# Altium PCB PCBDevkit.PcbDoc
Units mm, origin at the board's own origin, x right, y up, seen from the top; angles counter-clockwise.
Board outline 62.36 x 68.45 mm, 2 copper layers (Top Layer, Bottom Layer); 28 components, 24 nets, 139 pads, 7 vias.
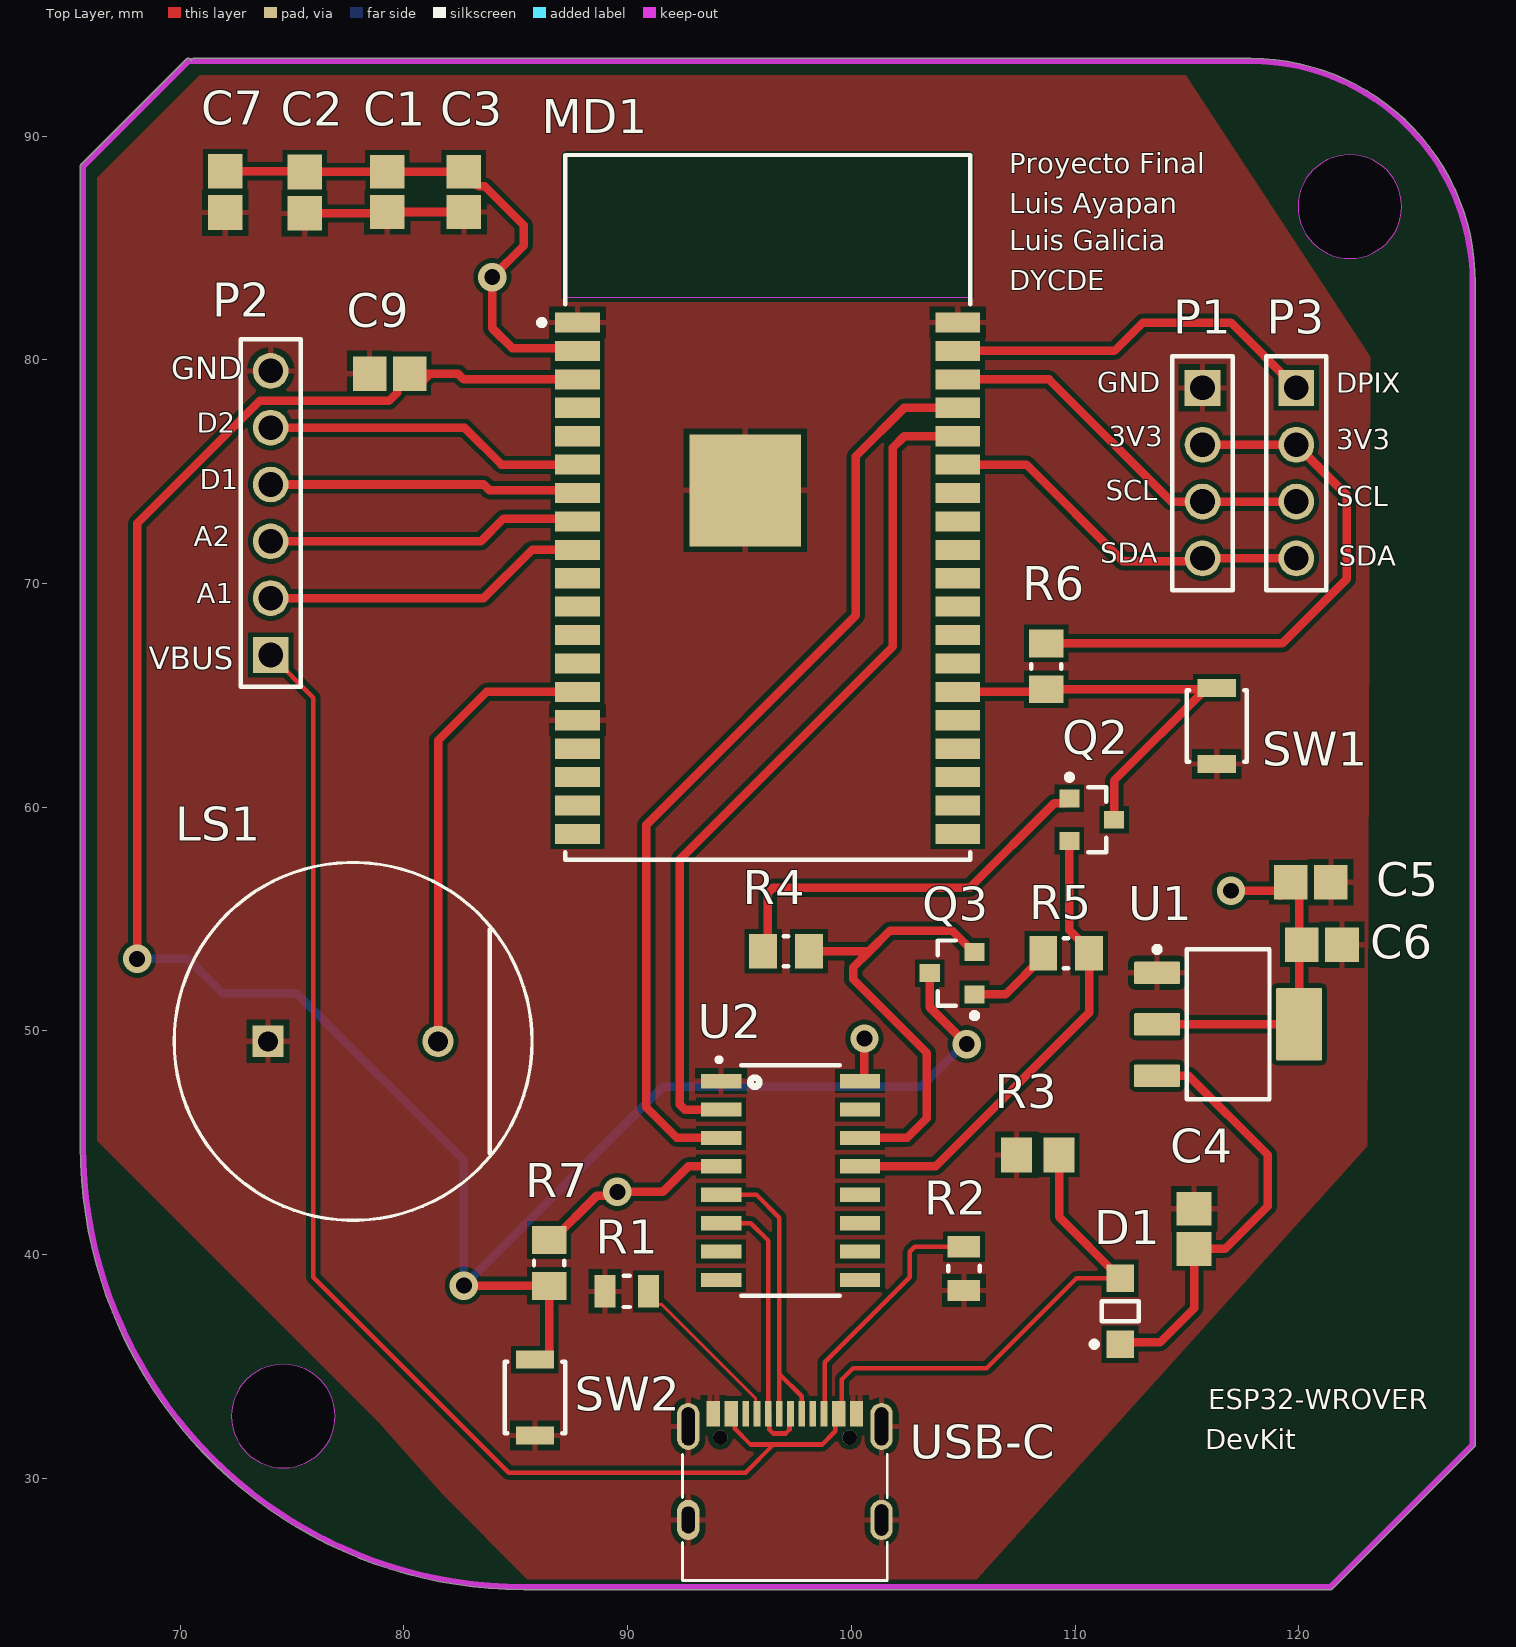
[diagram p0: Top Layer view]
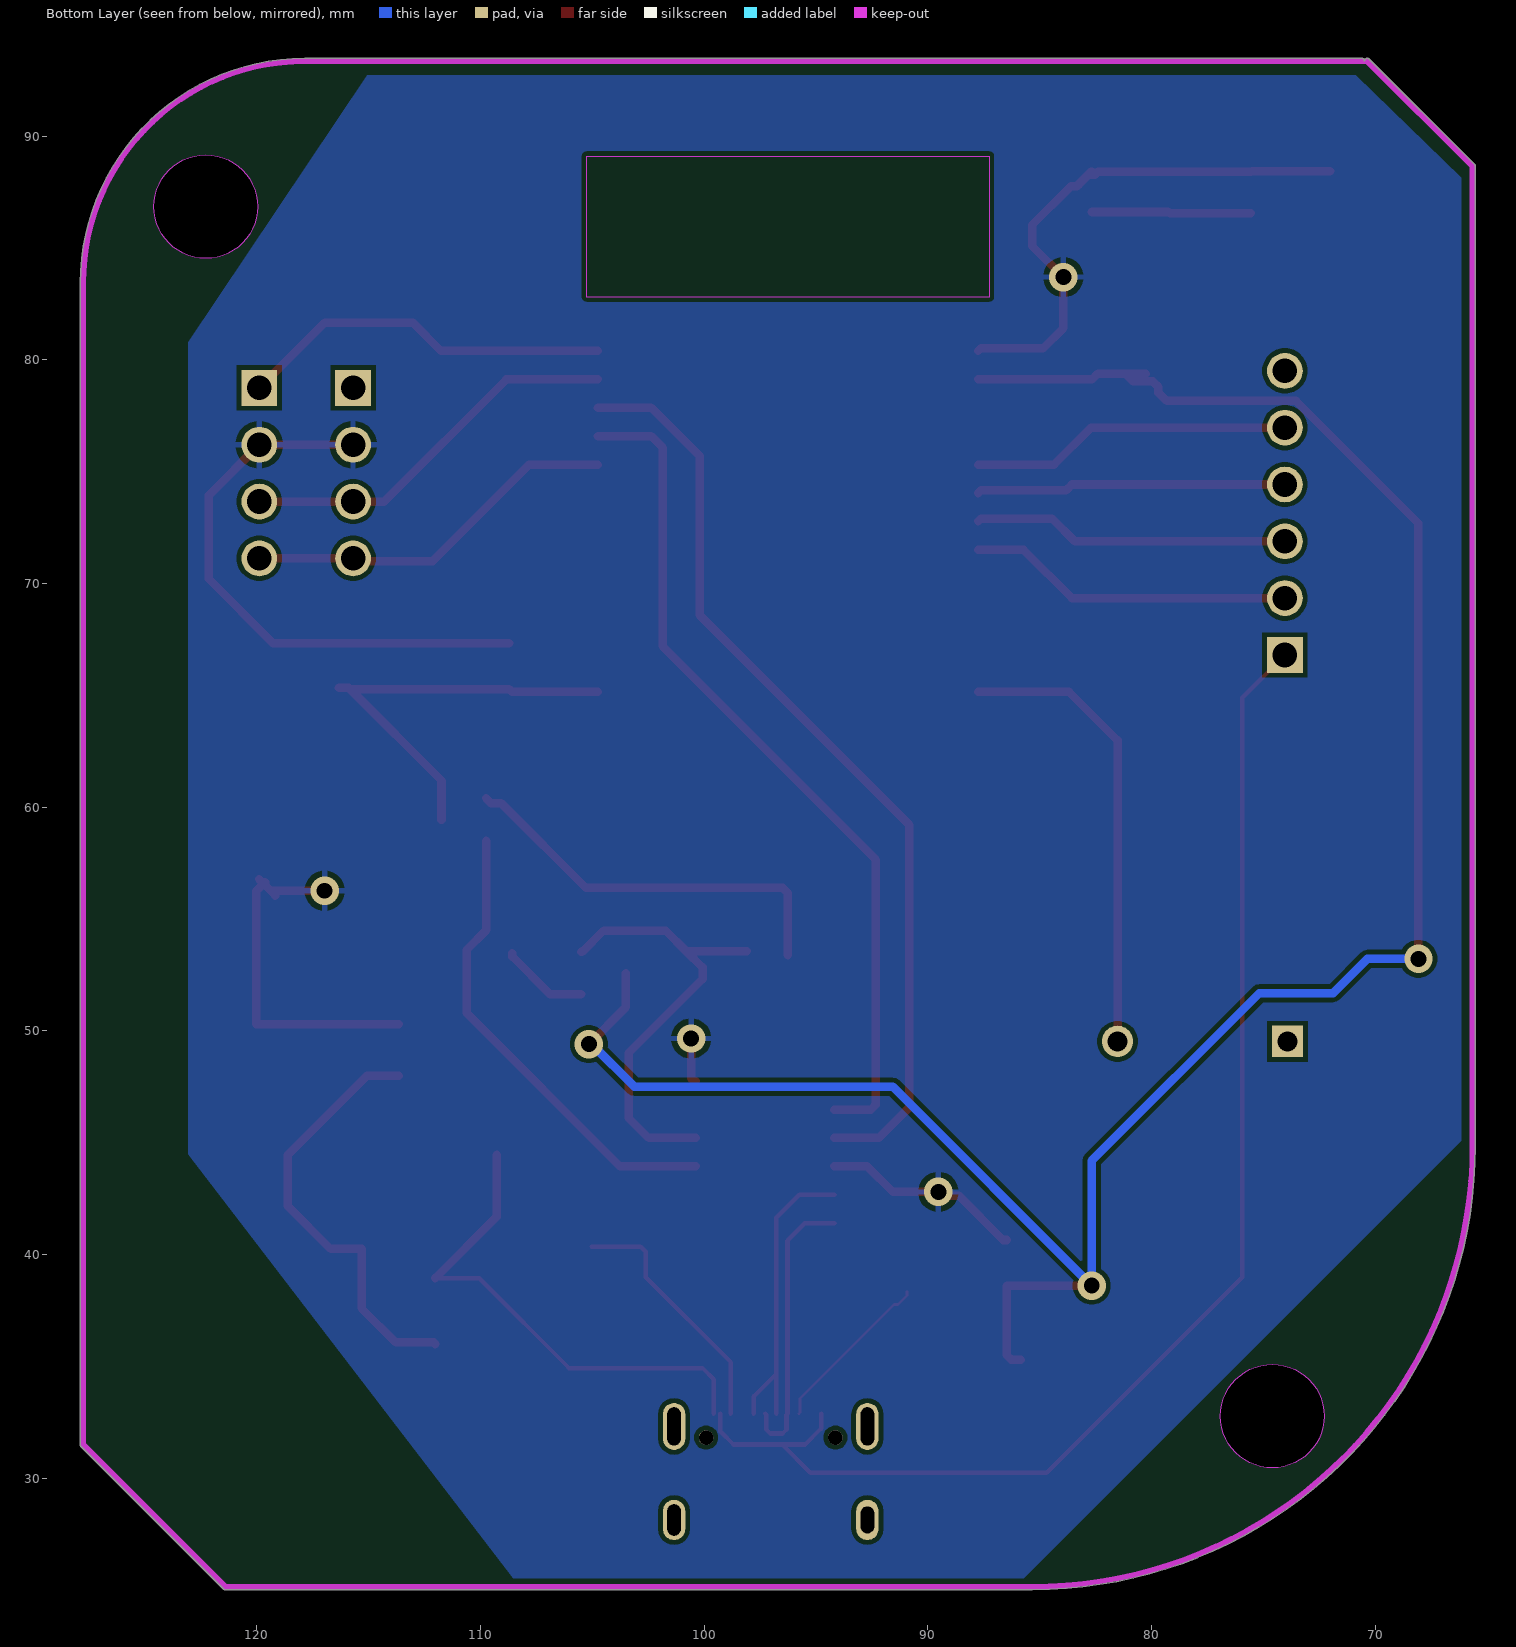
[diagram p1: Bottom Layer view, seen from below]

## Layer stack, top to bottom
Top Solder: solder mask 0.0102, Solder Resist, Dk 3.5
Top Layer: signal copper 0.0356
Dielectric 1: dielectric 0.32, FR-4, Dk 4.8
Bottom Layer: signal copper 0.0356
Bottom Solder: solder mask 0.0102, Solder Resist, Dk 3.5

## Board outline
65.532,44.83 cw(c65.657,44.831) 65.532,44.831 65.532,88.646 cw(c65.659,88.646) 65.569,88.737 70.268,93.435 cw(c70.358,93.345) 70.485,93.355 cw(c70.612,93.345) 70.612,93.472 117.852,93.472 cw(c117.852,83.435) 127.889,83.435 127.889,31.496 cw(c127.762,31.496) 127.852,31.406 121.503,25.056 cw(c121.412,25.146) 121.412,25.019 85.344,25.019 cw(c85.344,44.831)
cut-out: 72.287,32.779 ccw(c74.605,32.779) 74.605,30.461 ccw(c74.605,32.779) 76.922,32.779 ccw(c74.605,32.779) 74.605,35.097 ccw(c74.605,32.779)
cut-out: 119.966,86.846 ccw(c122.283,86.846) 122.283,84.529 ccw(c122.283,86.846) 124.601,86.846 ccw(c122.283,86.846) 122.283,89.164 ccw(c122.283,86.846)

## Design rules (kind name [scope] priority, off if disabled: settings)
Clearance "Clearance Bottom Layer" [OnLayer('Bottom Layer')] p1: gap=0.203 ignorepadtopadclearanceinfootprint=TRUE except(0.254: Arc-Text Track-Text SMDPad-Text THPad-Text Via-Text Fill-Text Poly-Text Region-Text Text-Text)
Clearance "Clearance Top Layer" [OnLayer('Top Layer')] p2: gap=0.203 ignorepadtopadclearanceinfootprint=TRUE except(0.254: Arc-Text Track-Text SMDPad-Text THPad-Text Via-Text Fill-Text Poly-Text Region-Text Text-Text)
Clearance [All] p3: gap=0.2 ignorepadtopadclearanceinfootprint=FALSE except(0.089: Arc-Arc Arc-Track Arc-SMDPad Track-Track Track-SMDPad SMDPad-SMDPad; 0.127: Arc-Via Track-Via SMDPad-Via THPad-Via Via-Via; 0.254: Arc-Text Track-Text SMDPad-Text THPad-Text Via-Text Fill-Text Poly-Text Region-Text Text-Text)
HoleSize [All] p1: absolutevalues=TRUE maxlimit=6.3 minlimit=0.2 maxpercent=80.000 minpercent=20.000
MinimumAnnularRing [All] p1: minimumring=0.076
MinimumSolderMaskSliver [All] p1: minsoldermaskwidth=0.1
PolygonConnect [All] p1: connectstyle=Relief reliefconductorwidth=0.254 reliefentries=4 polygonreliefangle="90 Angle" airgapwidth=0.254
RoutingVias [All] p1: holewidth=0.5 width=1 viastyle="Through Hole" minholewidth=0.2 minwidth=0.45 maxholewidth=1 maxwidth=2
SilkToSilkClearance [All] p1: silktosilkclearance=0.1
SilkToSolderMaskClearance [IsPad] p1: minsilkscreentomaskgap=0.1 clearancetoexposedcopper=TRUE
SolderMaskExpansion [All] p1: expansion=0.102 istentingtop=FALSE
Width [All] p1: maxlimit=2.54 minlimit=0.089 preferedwidth=0.381
26 further rules are at their usual default settings.

## Components (designator, comment, footprint, x,y, rotation, side; value= is the part's Value field where it differs from the comment)
C1 "C0805C106K4PACTU" CAPC2013X140X50ML20T25 79.248,87.503 r90 top
C2 "0.1 uF" CAPC2013X94X50ML20T25 75.565,87.467 r90 top
C3 "C0805C106K4PACTU" CAPC2013X140X50ML20T25 82.677,87.503 r90 top
C4 "10µF" CAPC2013X140X50ML20T25 115.316,41.148 r270 top
C5 "10µF" CAPC2013X140X50ML20T25 120.534,56.642 r180 top
C6 "1µF" CAPC2013X145X50ML20T25 121.031,53.848 r180 top
C7 "08055C104KAT2A" CAPC2013X94X50ML20T25 72.009,87.503 r90 top
C9 "10µF" CAPC2013X145X50ML20T25 79.364,79.375 r0 top
D1 "MBR120ESFT1G" ONSC-SOD-123FL-2-498_V 112.014,37.465 r90 top
LS1 "SD1614T5-B1" FP-SD1614T5-B1-MFG 77.724,49.53 r0 top
MD1 "ESP32-WROVER-I" FP-ESP32-WROVER-I-MFG 96.257,73.401 r0 top
P1 "61300411121" 61300411121 115.697,74.93 r270 top
P2 "61300611121" 61300611121 74.041,73.152 r90 top
P3 "61300411121" 61300411121 119.888,74.93 r270 top
Q2 "MMBT2222ALT1G" ONSC-SOT-23-3-318-08_V 110.744,59.436 r0 top
Q3 "MMBT2222ALT1G" ONSC-SOT-23-3-318-08_V 104.505,52.578 r180 top
R1 "5.1K" FP-CRCW0805-e3-MFG 89.957,38.354 r0 top
R2 "5.1K" FP-CRCW0805-e3-MFG 105.029,39.37 r90 top
R3 "100k" RESC2013X60X40ML20T25 108.331,44.45 r0 top
R4 "10 k" RESC2013X60X30ML20T20 97.08,53.556 r0 top
R5 "10 k" RESC2013X60X30ML20T20 109.601,53.467 r0 top
R6 "10 k" RESC2013X60X30ML20T20 108.712,66.294 r90 top
R7 "10 k" RESC2013X60X30ML20T20 86.487,39.624 r90 top
SW1 "B3U-1000P" FP-B3U-1000P-MFG 116.332,63.627 r90 top
SW2 "B3U-1000P" FP-B3U-1000P-MFG 85.852,33.606 r90 top
U1 "LM1117MPX-3.3/NOPB" DCY0004A_M 116.84,50.292 r0 top
U2 "CH340B" CH340B 97.282,43.307 r0 top
USB-C "U262-161N-4BVC11" U262-161N-4BVC11 97.028,29.21 r0 top

## Footprints (in the part's own frame and the unit in brackets; to place one, negate y for a bottom-side part, rotate by r counter-clockwise, add the part's x,y. Pads: shape width x height; smd on the part's side, far side on the other; paste and mask are expansions set on the pad)
61300411121 [mm] "Pin Header, pitch 2.54 mm, THT, Vertical, single row, 4p"
  rect 1.6x1.6 hole 1.1: 1(-3.81,0)
  round 1.6 hole 1.1: 2(-1.27,0) 3(1.27,0) 4(3.81,0)
  silkscreen extent -5.23,-1.35 5.23,1.35, body extent -5.08,-1.27 5.08,1.27, height 8.57
61300611121 [mm] "Pin Header, pitch 2.54 mm, THT, Vertical, single row, 6p"
  rect 1.6x1.6 hole 1.1: 1(-6.35,0)
  round 1.6 hole 1.1: 2(-3.81,0) 3(-1.27,0) 4(1.27,0) 5(3.81,0) 6(6.35,0)
  silkscreen extent -7.77,-1.35 7.77,1.35, body extent -7.62,-1.27 7.62,1.27, height 8.57
CAPC2013X94X50ML20T25 [mm] "Chip Capacitor, 2-Leads, Body 2.01x1.25mm, IPC Low Density"
  rect 1.55x1.55 smd: 1(-0.925,0) 2(0.925,0)
  body extent -1.1,-0.72 1.11,0.72, height 0.94
CAPC2013X140X50ML20T25 [mm] "Chip Capacitor, 2-Leads, Body 2.00x1.25mm, IPC Low Density"
  rect 1.5x1.55 smd: 1(-0.9,0) 2(0.9,0)
  body extent -1.1,-0.72 1.1,0.72, height 1.4
CAPC2013X145X50ML20T25 [mm] "Chip Capacitor, 2-Leads, Body 2.00x1.25mm, IPC Low Density"
  rect 1.5x1.55 smd: 1(-0.9,0) 2(0.9,0)
  body extent -1.1,-0.72 1.1,0.72, height 1.45
CH340B [mm] "- USB 2.0 Transceiver 2Mbps SOP-16_150mil USB ICs ROHS"
  rect 1.8x0.64 smd: 1(-3.105,4.445) 2(-3.105,3.175) 3(-3.105,1.905) 4(-3.105,0.635) 5(-3.105,-0.635) 6(-3.105,-1.905) 7(-3.105,-3.175) 8(-3.105,-4.445) 9(3.105,-4.445) 10(3.105,-3.175) 11(3.105,-1.905) 12(3.105,-0.635) 13(3.105,0.635) 14(3.105,1.905) 15(3.105,3.175) 16(3.105,4.445)
  silkscreen extent -3.3,-5.15 2.2,5.5, body extent -3.56,-5.51 3.56,5.51, height 2.14
DCY0004A_M [mm] "SOT223, 4-Leads, Body 6.7x3.7mm, Pitch 2.3mm, IPC Low Density"
  rrect10% 2.05x1 smd: 1(-3.175,2.3) 2(-3.175,0) 3(-3.175,-2.3)
  rrect5% 2.05x3.25 smd: 4(3.175,0)
  silkscreen extent -3.3,-3.35 1.85,3.47, body extent -3.5,-3.25 3.5,3.25, height 1.62
FP-B3U-1000P-MFG [mm]
  rect 0.8x1.7 smd paste+0 mask+0: 1(-1.7,0) 2(1.7,0)
  silkscreen extent -1.6,-1.35 1.6,1.35, body extent -2.2,-1.45 2.2,1.45, height 0.25
FP-CRCW0805-e3-MFG [mm]
  rect 0.95x1.45 smd paste+0 mask+0: 1(-0.975,0) 2(0.975,0)
  silkscreen extent -0.13,-0.7 0.13,0.7, body extent -1.55,-0.82 1.55,0.82, height 0.25
FP-ESP32-WROVER-I-MFG [mm]
  rect 2x0.9 smd paste+0 mask+0: 1(-8.5,8.26) 2(-8.5,6.99) 3(-8.5,5.72) 4(-8.5,4.45) 5(-8.5,3.18) 6(-8.5,1.91) 7(-8.5,0.64) 8(-8.5,-0.63) 9(-8.5,-1.9) 10(-8.5,-3.17) 11(-8.5,-4.44) 12(-8.5,-5.71) 13(-8.5,-6.98) 14(-8.5,-8.25) 15(-8.5,-9.52) 16(-8.5,-10.79) 17(-8.5,-12.06) 18(-8.5,-13.33) 19(-8.5,-14.6) 20(8.5,-14.6) 21(8.5,-13.33) 22(8.5,-12.06) 23(8.5,-10.79) 24(8.5,-9.52) 25(8.5,-8.25) 26(8.5,-6.98) 27(8.5,-5.71) 28(8.5,-4.44) 29(8.5,-3.17) 30(8.5,-1.9) 31(8.5,-0.63) 32(8.5,0.64) 33(8.5,1.91) 34(8.5,3.18) 35(8.5,4.45) 36(8.5,5.72) 37(8.5,6.99) 38(8.5,8.26)
  rect 5x5 smd paste+0 mask+0: 39(-1,0.76)
  Keep-Out Layer region: -9,9.4 9,9.4 9,15.7 -9,15.7
  Keep-Out Layer region: -9,9.4 9,9.4 9,15.7 -9,15.7
  silkscreen extent -10.22,-15.75 9.05,15.75, body extent -9.6,-15.85 9.6,15.85, height 0.25
FP-SD1614T5-B1-MFG [mm]
  rect 1.4x1.4 hole 0.9 paste-1000 mask+0: 1(-3.8,0)
  round 1.4 hole 0.9 paste-1000 mask+0: 2(3.8,0)
  silkscreen extent -8,-8 8,8, body extent -8.1,-8.1 8.1,8.1, height 0.25
ONSC-SOD-123FL-2-498_V [mm] "SOD, 2-Leads, Body 2.7x1.65mm"
  rect 1.25x1.22 smd: 1(-1.475,0) 2(1.475,0)
  silkscreen extent -1.6,-0.82 0.45,1.28, body extent -1.35,-0.82 1.35,0.82, height 0.98
ONSC-SOT-23-3-318-08_V [mm] "SOT23, 3-Leads, Body 2.92x1.3mm, Pitch 0.95mm"
  rect 0.9x0.8 smd: 1(-1,0.95) 2(-1,-0.95) 3(1,0)
  silkscreen extent -1.12,-1.46 0.65,2.02, body extent -0.65,-1.46 0.65,1.46, height 1.11
RESC2013X60X30ML20T20 [mm] "Chip Resistor, 2-Leads, Body 2.00x1.25mm, IPC Low Density"
  rect 1.25x1.55 smd: 1(-1.025,0) 2(1.025,0)
  silkscreen extent -0.1,-0.67 0.1,0.67, body extent -1.1,-0.72 1.1,0.72, height 0.6
RESC2013X60X40ML20T25 [mm] "Chip Resistor, 2-Leads, Body 2.00x1.25mm, IPC Low Density"
  rect 1.4x1.55 smd: 1(-0.95,0) 2(0.95,0)
  body extent -1.1,-0.72 1.1,0.72, height 0.6
U262-161N-4BVC11 [mm] "USB-C"
  rect 0.3x1.15 smd: A1(-3.35,3.67) A4(-2.55,3.67) A5(-1.25,3.67) A6(-0.25,3.67) A7(0.25,3.67) A8(1.25,3.67) A9(2.55,3.67) A12(3.35,3.67) B1(3.05,3.67) B4(2.25,3.67) B5(1.75,3.67) B6(0.75,3.67) B7(-0.75,3.67) B8(-1.75,3.67) B9(-2.25,3.67) B12(-3.05,3.67)
  rrect100% 1x1.8 hole 1.2 slot 0.6 at 0 deg: S1(-4.32,-1.075)
  rrect100% 1x2.1 hole 1.7 slot 0.6 at 0 deg: S2(-4.32,3.105) S3(4.32,3.105)
  rrect100% 1x1.8 hole 1.4 slot 0.6 at 0 deg: S4(4.32,-1.075)
  round 0.65 hole 0.65: Un1(2.89,2.605) Un2(-2.89,2.605)
  silkscreen extent -4.58,-3.78 4.58,1.85, body extent -4.45,-3.55 4.45,4.01, height 3.33

## Part data
C1 C3 C4 C5: library part CMP-2007-03242-1, "10µF ±10% 16V Ceramic Capacitor X5R 0805 (2012 Metric)", Part Number=CL21A106KOQNNNG
C2 C7: library part CMP-2000-05016-1, "Chip Capacitor, Ceramic, 0.1 uF, 10%, 50 V, 0805, RoHS, Tape and Reel", Capacitance=100nF, Case Size/Dimension=0805, Dielectric=X7R, Manufacturer=AVX, Rated Voltage=50V, Tolerance (%)=±10%, Datasheet URL=http://www.farnell.com/datasheets/319609.pdf, Datasheet Version=Sep-07, Manufacturer URL=http://www.avx.com/
C6: library part CMP-2007-01082-1, "1µF ±10% 16V Ceramic Capacitor X7R 0805 (2012 Metric)", Manufacturer=Kemet, Part Number=C0805C105K4RAC7800
C9: library part CMP-2007-01082-1, "10µF ±10% 16V Ceramic Capacitor X7R 0805 (2012 Metric)", Manufacturer=Kemet, Part Number=C0805C105K4RAC7800
D1: library part CMP-1055-00434-1, "Schottky Power Rectifier, 2-Pin SOD-123, Pb-Free, Tape and Reel", Manufacturer="On Semiconductor", ComponentLink1Description="Manufacturer URL", ComponentLink1URL=http://www.onsemi.com/, ComponentLink2Description=Datasheet, ComponentLink2URL=http://www.onsemi.cn/pub_link/Collateral/MBR120ESFT1-D.PDF, ComponentLink3Description="Package Specification", ComponentLink3URL=http://www.onsemi.com/pub_link/Collateral/498-01.PDF, Configuration=Single, DatasheetVersion="Rev. 4", IFSM Max (A)=40, Mounting Technology="Surface Mount", PackageDescription="2-Pin SOD, Body 1.65 x 2.7 mm", PackageReference=SOD-123FL-2-498, PackageVersion="Rev. D, 05/2013", Packing="Tape and Reel", PartNumber=MBR120ESFT1G, RoHS=TRUE
LS1: library part CMP-08413-000012-1, "AUDIO MAGNETIC XDCR 3-6V TH", Frequency=2.048kHz, Max Operating Temperature=70°C, Max Supply Current=80mA, Min Operating Temperature=-10°C, Operating Supply Voltage=5V, Package Quantity=480, Self Resonant Frequency=2.05kHz, Diameter=16mm, Height=14mm, Mount="Through Hole", Number of Pins=2, Number of Terminals/Pins=2, Operating Supply Current=80mA, Packaging=Tray, Sensing Method=Magnetic, Series=SD, Termination="PC Pins", Voltage Rating (DC)=5V, Washable=No
MD1: library part CMP-194065-000001-1, "SMD MODULE, ESP32-D0WDQ6, 32MBIT", Manufacturer=Espressif, Max Frequency=2484MHz, Max Supply Voltage=3.6V, Min Supply Voltage=2.3V, Nominal Supply Current=500mA, Temperature="-40°C to +85°C", Temperature Range High=+85°C, Temperature Range Low=-40°C, Automotive=No, Category=UNK, ComponentLink2Description=Datasheet, ComponentLink2URL=https://www.espressif.com/sites/default/files/documentation/esp32-wrover_datasheet_en.pdf, Data Rate=150Mbits/s, Device Class L1="Integrated Circuits (ICs)", Device Class L2="RF Semiconductors and Devices", Device Class L3=Transceivers, Digikey Description="SMD MODULE, ESP32-D0WDQ6, 32MBIT", Height=3.4mm, Interface=I2C,SPI,UART,I2S,Other, Lead Free=Yes, Manufacturer Part Number=ESP32-WROVER-I, Number Of Adc Channels=16, Number Of Gpio=20, Octopart=https://octopart.com/esp32-wrover-i-espressif+systems-89171349, Package=ESP32-WROVER-I, RoHS=TRUE, Sensitivity=-98dBm
P1 P3: library part CMP-1502-01064-1, "THT Vertical Pin Header WR-PHD, Pitch 2.54 mm, Single Row, 4 pins", Contact Resistance=20mOhm, Manufacturer="Wurth Elektronik", Operating Temperature=-40to105degC, Rated Current=3A, Withstanding Voltage=500VAC, Working Voltage=250VAC, Datasheet URL=https://katalog.we-online.de/em/datasheet/6130xx11121.pdf, Gender=Male, Manufacturer URL=http://www.we-online.de, Mounting Technology=THT, Orientation=Vertical, Package Reference=61300411121, Packaging=Bag, Part Number=61300411121, Pin Number=4, Pitch=2.54mm, Publisher=WurthElektronik, Row Number=Single
P2: library part CMP-1502-01070-1, "THT Vertical Pin Header WR-PHD, Pitch 2.54 mm, Single Row, 6 pins", Contact Resistance=20mOhm, Manufacturer="Wurth Elektronik", Operating Temperature=-40to105degC, Rated Current=3A, Withstanding Voltage=500VAC, Working Voltage=250VAC, Datasheet URL=https://katalog.we-online.de/em/datasheet/6130xx11121.pdf, Gender=Male, Manufacturer URL=http://www.we-online.de, Mounting Technology=THT, Orientation=Vertical, Package Reference=61300611121, Packaging=Bag, Part Number=61300611121, Pin Number=6, Pitch=2.54mm, Publisher=WurthElektronik, Row Number=Single
Q2 Q3: library part CMP-1048-00538-1, "General Purpose Transistor, NPN Silicon, 3-Pin SOT-23, Pb-Free, Tape and Reel", Manufacturer="On Semiconductor", ComponentLink1Description="Manufacturer URL", ComponentLink1URL=http://www.onsemi.com/, ComponentLink2Description=Datasheet, ComponentLink2URL=http://www.onsemi.cn/pub_link/Collateral/MMBT2222LT1-D.PDF, ComponentLink3Description="Package Specification", ComponentLink3URL=http://www.onsemi.cn/pub_link/Collateral/318-08.PDF, DatasheetVersion="Rev. 10", fT Min (MHz)=300, IC Continuous (A)=0.6, Mounting Technology="Surface Mount", PackageDescription="3-Pin Small Outline Transistor, Body 2.92 x 1.3 mm, Pitch 0.95 mm", PackageReference=SOT-23-3-318-08, PackageVersion="Rev. AP, 11/2009", Packing="Tape and Reel", PartNumber=MMBT2222ALT1G, Polarity=NPN, RoHS=TRUE
R1 R2: library part CMP-2001-04024-2, "RES Thick Film, 5.1kΩ, 1%, 0.125W, 100ppm/°C, 0805", Case Code (Imperial)=0805, Case Code (Metric)=2012, Max Operating Temperature=155°C, Max Power Dissipation=125mW, Min Operating Temperature=-55°C, Package Quantity=10, Resistance=5.1kR, Temperature Coefficient=100ppm/°C, Tolerance=1%, Voltage Rating=150V, Case/Package=0805, Composition="Thick Film", Contact Plating=Tin, Depth=1.25mm, Features="Automotive AEC-Q200", Height=0.45mm, Lead Free="Lead Free", Length=2mm, Military Standard=Not, Mount="Surface Mount", Number of Terminations=2, Packaging="Tape and Reel", Power Rating=125mW, Radiation Hardening=No, Termination=SMD/SMT, Voltage Rating (DC)=150V, Weight=0.000194oz, Width=0.049inch
R3: library part CMP-2001-00583-1, "100 kOhms ±0.1% 0.125W, 1/8W Chip Resistor 0805 (2012 Metric) Automotive AEC-Q200 Thin Film", Manufacturer=Panasonic, Part Number=ERA6AEB104V
R4 R5 R6 R7: library part CMP-2001-04657-1, "10 kOhms ±5% 0.25W, 1/4W Chip Resistor 0805 (2012 Metric) Automotive AEC-Q200, Moisture Resistant Thick Film", Manufacturer="KOA Speer", Part Number=RK73B2ATTD103J
SW1 SW2: library part CMP-2100-03586-2, "SWITCH TACTILE SPST-NO 0.05A 12V", Contact Current Rating=50mA, Contact Resistance=100mR, Insulation Resistance=100MR, Max Operating Temperature=70°C, Max Voltage Rating (DC)=12V, Min Operating Temperature=-25°C, Operating Force=1.5N, Package Quantity=1, Ratings="Dust Proof", Actuator Length=0.4mm, Actuator Type=Standard, Contact Material=Silver, Current Rating=50mA, Depth=2.5mm, Electrical Life=200000Cycles, Height=1.2mm, Illumination Type=Non-Illuminated, Lead Free="Lead Free", Length=4mm, Max Current Rating=50mA, Mechanical Life=200000Cycles, Mount="Surface Mount", Orientation=Straight, Packaging="Tape and Reel", Switch Function=Off-Mom, Switch Travel=0.15mm, Termination=SMD/SMT, Throw Configuration=SPST, Voltage Rating (DC)=12V, Weight=0.000776oz, Width=3mm
U1: library part CMP-0062-01639-4, "800mA Low-Dropout Linear Regulator, 4-pin SOT-223, Pb-Free", Manufacturer="Texas Instruments", PackageTopMarking=XYTT*N05A, PowerWise=N, Code_IPC=SOT223-4, Code_JEDEC=TO-261-AA, ComponentLink1Description="Datasheet URL", ComponentLink1URL=http://www.ti.com/general/docs/lit/getliterature.tsp?genericPartNumber=LM1117-N&fileType=pdf, CompType="LDO IC", High-Reliability=Y, PackageDescription="Molded SOT-223, 6.50 x 3.56 x 1.6mm Body, 4 Lead, 2.3mm Pitch", PackageReference=DCY0004A, PartNumber=LM1117MPX-3.3/NOPB, PinCount=4, RoHS=Y
U2: "- USB 2.0 Transceiver 2Mbps SOP-16_150mil USB ICs ROHS", ComponentLink1Description=Datasheet, ComponentLink1URL=https://www.mpja.com/download/35227cpdata.pdf
USB-C: "USB - Type C Female 16 SMT USB Connectors RoHS", ComponentLink1Description=datasheet, ComponentLink1URL=https://datasheet.lcsc.com/szlcsc/2002271811_XKB-Connectivity-U262-161N-4BVC11_C319148.pdf, ComponentLink2Description="LCSC Link", ComponentLink2URL=https://lcsc.com/product-detail/USB-Connectors_XKB-Connectivity-U262-161N-4BVC11_C319148.html

## Via types
v1: diameter 1.27, hole 0.711, Top Layer to Bottom Layer, 7 vias

## Nets (pads, with @x,y where several pads share a name; then routed paths per layer and width w, separated by ;. In a path a pad name is that pad's centre, name@x,y a point inside that pad or via, vN(x,y) a via of type N, cw(c..) or ccw(c..) an arc to the next point about the centre after c; other vN are vias at no path point)
3V3: C1.2 C2.2 C3.2 C5.2 C6.2 C7.2 MD1.2 P1.2 P3.2 R6.2 R7.2 U1.2 U1.4 U2.4 U2.16 | length 77.6
  Top Layer w0.381: C7.2 75.529,88.428 C2.2 79.237,88.392 C1.2 82.412,88.403 82.545,88.27 C3.2@82.834,88.27 ; C3.2 82.702,88.403 C3.2@82.834,88.27 ; R7.2 86.637,40.649 88.617,42.629 89.365,42.629 v1(89.535,42.799) 91.567,42.799 92.71,43.942 U2.4 ; MD1.2 87.63,80.518 84.836,80.518 83.947,81.407 v1(83.947,83.693) 85.344,85.09 85.344,86.018 83.615,87.747 C3.2@83.333,87.747 ; U2.16 100.454,47.752 100.584,47.882 v1(100.584,49.657) ; R6.2 119.262,67.319 122.143,70.2 122.143,73.945 P3.2 P1.2 ; U1.2 U1.4 120.015,56.261 C5.2@119.697,56.578 ; v1(116.967,56.261) 117.221,56.007 117.221,56.104 117.378,56.261 C5.2@119.168,56.261 ; C5.2@119.253,56.261 C5.2@119.168,56.261 ; C5.2 C5.2@119.697,56.578 ; C5.2@119.888,56.769 C5.2@119.697,56.578 ; C3.2@82.834,88.27 C3.2@83.261,87.843 ; C3.2@83.261,87.843 83.333,87.772 C3.2@83.333,87.747 ; C3.2@83.261,87.843 83.261,87.818 C3.2@83.333,87.747 ; C5.2@119.168,56.261 119.168,56.049 C5.2@119.697,56.578
D+: U2.5 USB-C.A6 USB-C.B6 | length 14
  Top Layer w0.203: U2.5 95.758,42.672 96.778,41.652 96.778,34.671 96.778,34.662 ; USB-C.A6 96.778,34.662 ; USB-C.B6 97.778,33.662 96.778,34.662
D-: U2.6 USB-C.A7 USB-C.B7 | length 12.7
  Top Layer w0.127: 96.27,40.636 96.27,40.628 96.278,40.62
  Top Layer w0.203: U2.6 95.504,41.402 96.27,40.636 ; 96.278,40.62 USB-C.B7 96.323,32.835 96.323,32.179 96.502,32 97.054,32 97.233,32.179 97.233,32.835 USB-C.A7
DTR: Q2.2 R5.2 U2.13 | length 21.1
  Top Layer w0.381: U2.13 103.759,43.942 110.626,50.809 R5.2 110.626,53.617 109.744,54.499 Q2.2
GND: C1.1 C2.1 C3.1 C4.1 C5.1 C6.1 C7.1 C9.1 LS1.1 MD1.1 MD1.15 MD1.38 MD1.39 P1.1 P2.6 R1.1 R2.1 R3.1 SW1.1 SW2.1 U1.1 U2.1 USB-C.A1 USB-C.A12 USB-C.B1 USB-C.B12 USB-C.S1 USB-C.S2 USB-C.S3 USB-C.S4 | length 7.1
  Top Layer w0.381: C2.1 79.187,86.542 C1.1 C3.1
GPIO0: MD1.25 Q2.3 R6.1 SW1.2 | length 19.2
  Top Layer w0.381: MD1.25 108.594,65.151 R6.1 SW1.2@115.824,65.269 ; Q2.3 111.744,61.189 SW1.2@115.824,65.269 ; SW1.2 115.882,65.327 SW1.2@115.824,65.269
GPIO12: LS1.2 MD1.14 | length 20.9
  Top Layer w0.381: LS1.2@81.524,49.205 81.524,62.982 83.693,65.151 MD1.14
GPIO23: MD1.37 P3.1 | length 16.9
  Top Layer w0.381: MD1.37 111.76,80.391 113.03,81.661 116.967,81.661 P3.1
GPIO32: MD1.8 P2.3 | length 14.2
  Top Layer w0.381: P2.3 83.439,71.882 84.455,72.898 87.63,72.898 MD1.8
GPIO33: MD1.9 P2.2 | length 14.6
  Top Layer w0.381: P2.2 83.566,69.342 85.725,71.501 MD1.9
GPIO34: MD1.6 P2.5 | length 14.4
  Top Layer w0.381: P2.5 82.706,76.962 84.357,75.311 MD1.6
GPIO35: MD1.7 P2.4 | length 13.9
  Top Layer w0.381: P2.4 83.566,74.422 83.82,74.168 87.63,74.168 MD1.7
NetC4_2: C4.2 D1.1 U1.3 | length 19.4
  Top Layer w0.381: D1.1 112.092,36.068 113.792,36.068 115.316,37.592 C4.2 116.702,40.248 118.618,42.164 118.618,44.45 115.076,47.992 U1.3
NetQ2_1: Q2.1 R4.1 | length 18
  Top Layer w0.381: R4.1@96.266,53.369 96.266,56.165 96.489,56.388 105.283,56.388 109.071,60.176 109.534,60.176 Q2.1
NetQ3_1: Q3.1 R5.1 | length 3.9
  Top Layer w0.381: Q3.1 106.887,51.628 108.576,53.317 R5.1
NetR1_2: R1.2 USB-C.A5 | length 7.6
  Top Layer w0.127: R1.2 90.932,38.174 91.344,37.763 91.523,37.763 95.722,33.564 95.722,32.936 USB-C.A5
NetR2_2: R2.2 USB-C.B5 | length 11.3
  Top Layer w0.203: USB-C.B5@98.806,32.88 98.806,35.179 102.616,38.989 102.616,40.122 102.839,40.345 R2.2
RESET: C9.2 MD1.3 Q3.3 R7.1 SW2.2 | length 105.4
  Top Layer w0.381: v1(68.072,53.213) 68.072,72.681 73.547,78.156 79.326,78.156 79.704,78.534 79.704,78.791 79.947,79.033 80.824,79.033 81.166,79.375 ; C9.2 81.166,79.375 ; v1(82.677,38.608) 86.478,38.608 R7.1 86.487,35.516 86.277,35.306 SW2.2 ; MD1.3 82.672,79.121 82.418,79.375 81.166,79.375 ; Q3.3 103.505,51.054 v1(105.156,49.403)
  Bottom Layer w0.381: v1(68.072,53.213) 70.358,53.213 71.882,51.689 75.184,51.689 82.677,44.196 v1(82.677,38.608) 91.567,47.498 103.124,47.498 105.029,49.403 v1(105.156,49.403)
RTS: Q3.2 R4.2 U2.14 | length 20.7
  Top Layer w0.381: R4.2 100.8,53.556 ; U2.14 102.489,45.212 103.378,46.101 103.378,49.008 100.076,52.31 100.076,52.832 100.8,53.556 ; Q3.2 105.455,53.528 104.5,54.483 101.727,54.483 100.8,53.556
RXD0: MD1.34 U2.2 | length 38.4
  Top Layer w0.381: U2.2 92.552,46.482 92.329,46.705 92.329,57.658 101.854,67.183 101.854,76.073 102.362,76.581 MD1.34
SCL: MD1.36 P1.3 P3.3 | length 17.4
  Top Layer w0.381: MD1.36 108.839,79.121 114.3,73.66 P1.3 P3.3
SDA: MD1.33 P1.4 P3.4 | length 17
  Top Layer w0.381: MD1.33 107.823,75.311 112.141,70.993 115.57,70.993 P1.4 P3.4
TXD0: MD1.35 U2.3 | length 42.3
  Top Layer w0.381: U2.3 92.202,45.212 90.836,46.578 90.836,59.213 100.203,68.58 100.203,75.692 102.362,77.851 MD1.35
VBUS: D1.2 P2.1 R3.2 USB-C.A4 USB-C.A9 USB-C.B4 USB-C.B9 | length 82.3
  Top Layer w0.203: P2.1 75.946,64.897 75.946,38.989 84.684,30.251 95.266,30.251 96.52,31.505 ; USB-C.B9 94.778,32.222 95.491,31.509 98.692,31.509 99.278,32.095 USB-C.B4 ; USB-C.A9 99.578,34.427 100.076,34.925 106.045,34.925 110.06,38.94 D1.2
  Top Layer w0.381: R3.2 109.281,41.688 112.014,38.955 D1.2
pads on no net: MD1.4 MD1.5 MD1.10 MD1.11 MD1.12 MD1.13 MD1.16 MD1.17 MD1.18 MD1.19 MD1.20 MD1.21 MD1.22 MD1.23 MD1.24 MD1.26 MD1.27 MD1.28 MD1.29 MD1.30 MD1.31 MD1.32 U2.7 U2.8 U2.9 U2.10 U2.11 U2.12 U2.15 USB-C.A8 USB-C.B8 USB-C.Un1 USB-C.Un2

## Polygon pours and split planes (outlines as drawn)
3V3 on Bottom Layer "3V3_L02_P001" (solid, pour order 1): 70.883,92.71 115.062,92.71 123.063,80.772 123.063,44.483 108.53,25.527 85.725,25.527 66.171,45.081 66.171,88.135
GND on Top Layer "GND_L01_P000" (solid, pour order 0): 105.486,25.347 123.063,44.831 123.19,80.137 114.935,92.71 70.866,92.71 66.294,88.138 66.294,45.085 78.867,32.512 81.724,29.273 85.598,25.4 90.17,25.4 90.551,25.4

## Keep-outs
Keep-Out Layer:
  lines w0.254: 65.659,44.831 ccw(c85.344,44.831) 85.344,25.146 121.412,25.146 127.762,31.496 127.762,83.435 ccw(c117.852,83.435) 117.852,93.345 70.612,93.345 70.358,93.345 65.659,88.646 65.659,85.09 65.659,44.831

## Silkscreen, mask and mechanical layers (free items; w line width, h text height)
Top Overlay:
  text "Proyecto Final" at 107.061,88.043 h1.52
  text "Luis Ayapan" at 107.061,86.265 h1.52
  text "Luis Galicia" at 107.061,84.599 h1.52
  text "DYCDE" at 107.061,82.821 h1.52
  text "GND" at 110.998,78.249 h1.52
  text "DPIX" at 121.666,78.232 h1.52
  text "D2" at 70.739,76.454 h1.52
  text "3V3" at 111.506,75.836 h1.52
  text "3V3" at 121.666,75.709 h1.52
  text "D1" at 70.866,73.914 h1.52
  text "SCL" at 111.379,73.423 h1.52
  text "SCL" at 121.666,73.169 h1.52
  text "A2" at 70.612,71.374 h1.52
  text "SDA" at 111.125,70.629 h1.52
  text "SDA" at 121.793,70.502 h1.52
  text "A1" at 70.739,68.834 h1.52
  text "ESP32-WROVER" at 115.951,32.783 h1.52
  text "DevKit" at 115.824,31.004 h1.52
Mechanical 1:
  lines w0.508: 65.532,44.83 ccw(c85.344,44.831) 85.344,25.019 121.412,25.019 ccw(c121.412,25.146) 121.502,25.056 127.852,31.406 ccw(c127.762,31.496) 127.889,31.496 127.889,83.435 ccw(c117.852,83.435) 117.852,93.472 70.612,93.472 ccw(c70.612,93.345) 70.485,93.355 ccw(c70.358,93.345) 70.268,93.435 65.569,88.737 ccw(c65.659,88.646) 65.532,88.646 65.532,44.831 ccw(c65.657,44.831) 65.532,44.83 ; 72.287,32.779 cw(c74.605,32.779) 74.605,35.097 cw(c74.605,32.779) 76.922,32.779 cw(c74.605,32.779) 74.605,30.461 cw(c74.605,32.779) 72.287,32.779 ; 119.966,86.846 cw(c122.283,86.846) 122.283,89.164 cw(c122.283,86.846) 124.601,86.846 cw(c122.283,86.846) 122.283,84.529 cw(c122.283,86.846) 119.966,86.846

## Text inside footprints (layer, text, board x,y; h text height)
P2: Top Overlay "VBUS" at 68.58,66.167 h1.02 r359.91; Top Overlay "GND" at 69.596,79.121 h1.02 r359.98